# Altium PCB Hammerhead PCB R1.0.PcbDoc (part 1 of 2)
Units mil, origin at the board's own origin, x right, y up, seen from the top; angles counter-clockwise.
Board outline 4625 x 2150 mil, 4 copper layers (Top Layer, Ground Plane, Power Plane, Bottom Layer); 195 components, 202 nets, 791 pads, 418 vias.
Unrouted connection lines stored in the file: 1.
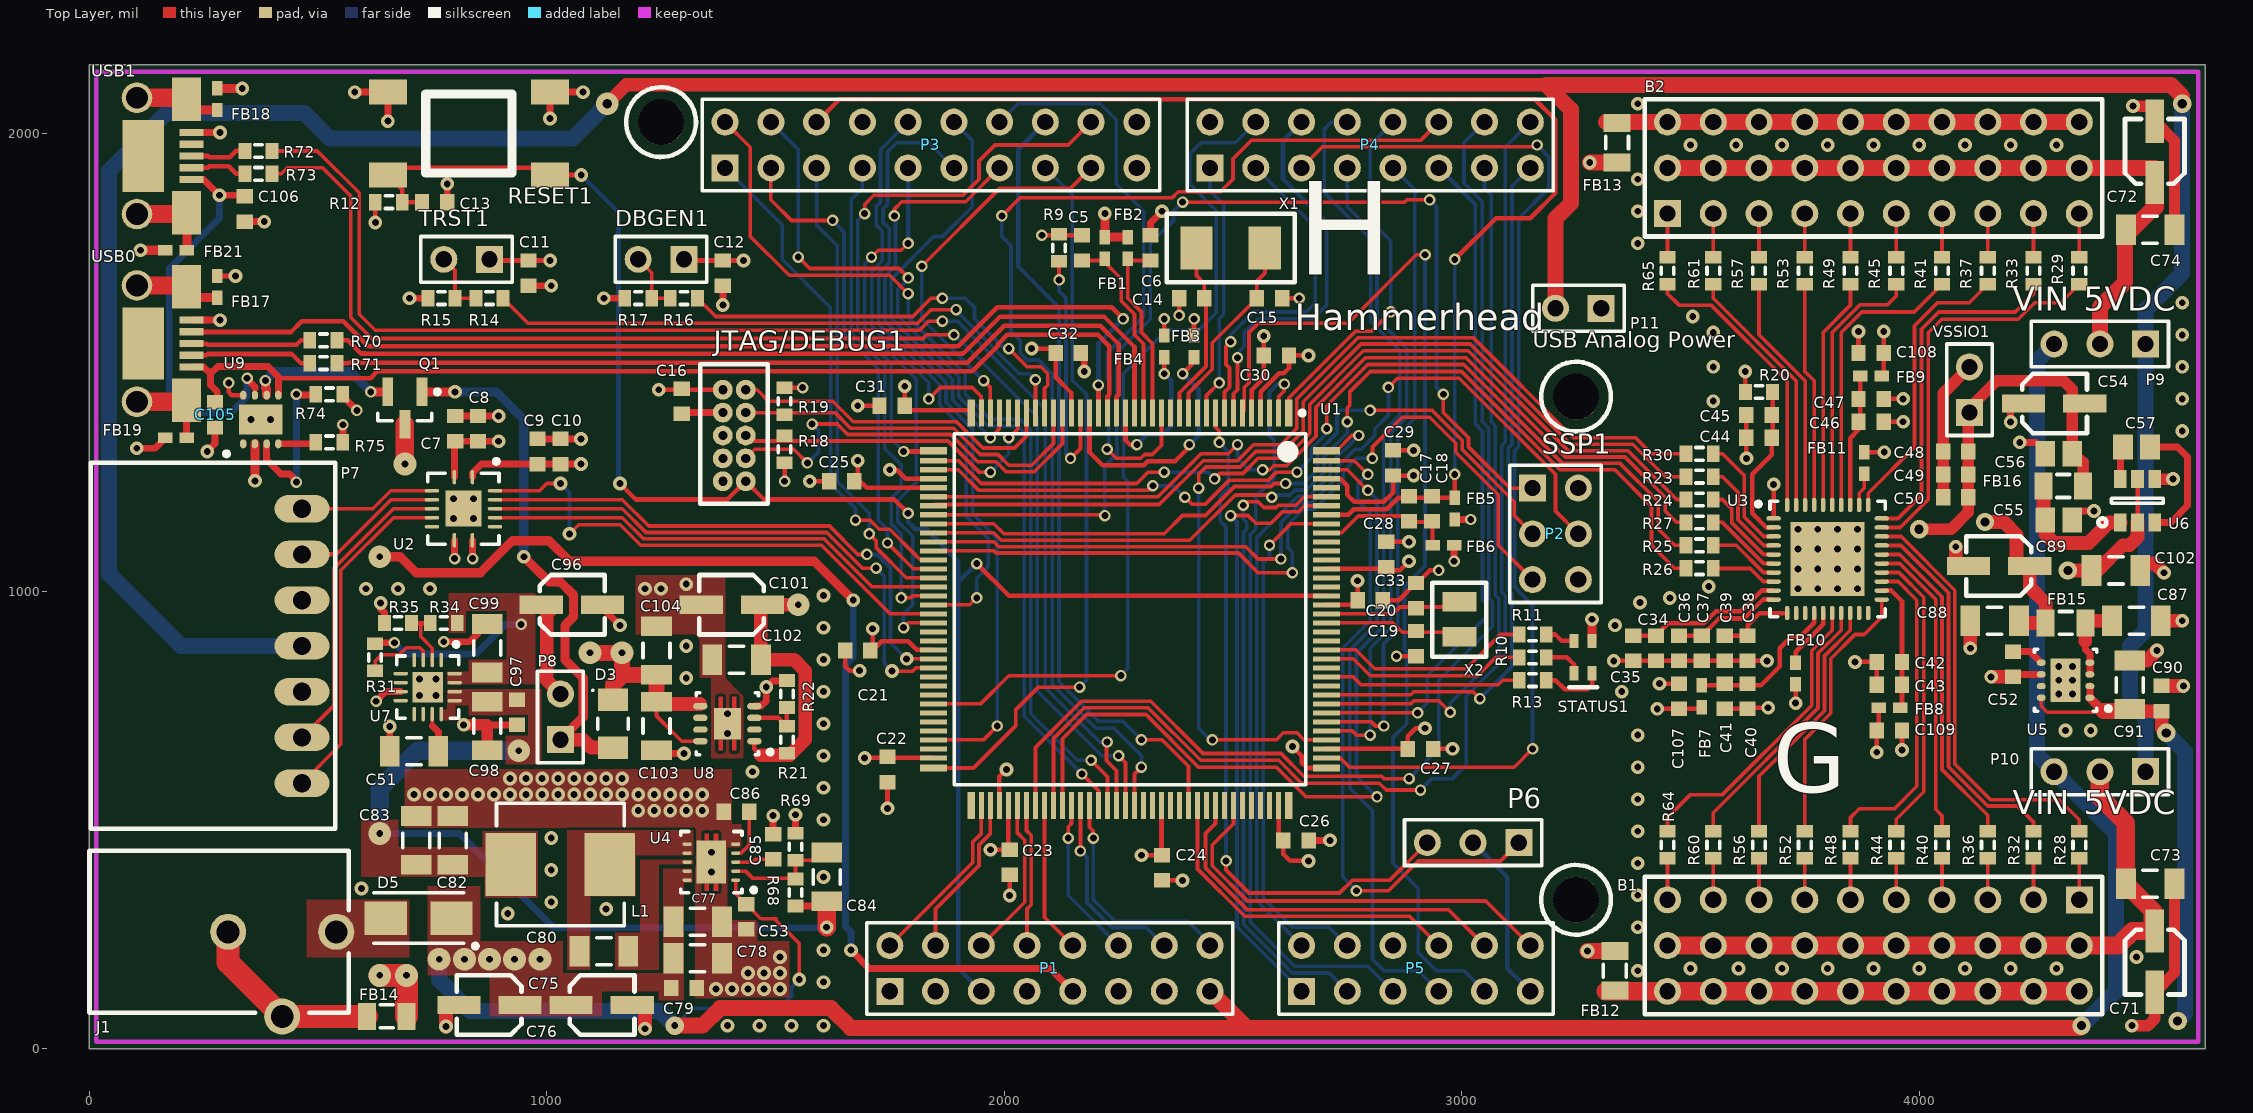
[diagram p0: Top Layer view]
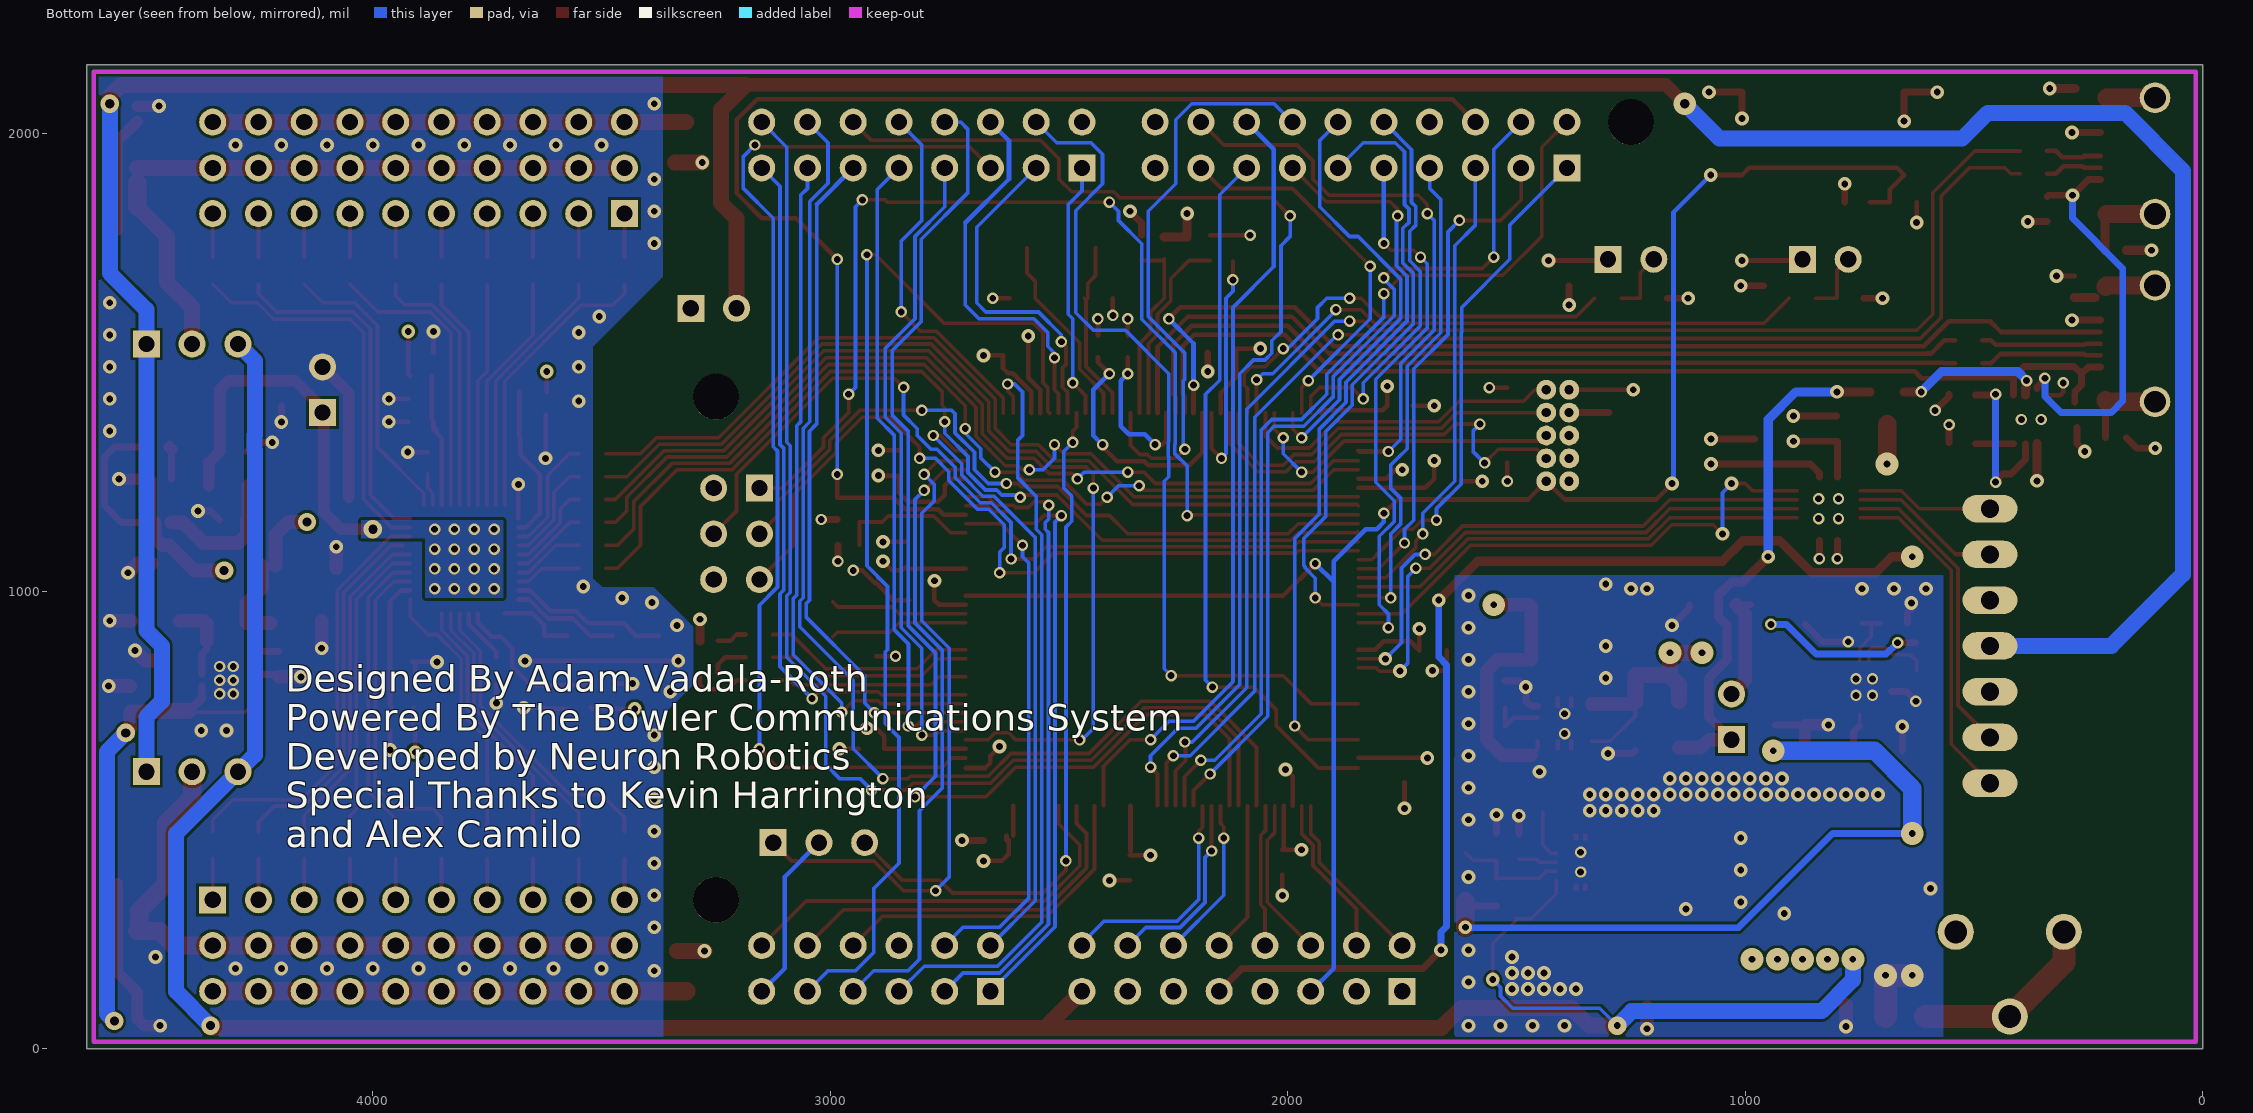
[diagram p1: Bottom Layer view, seen from below]
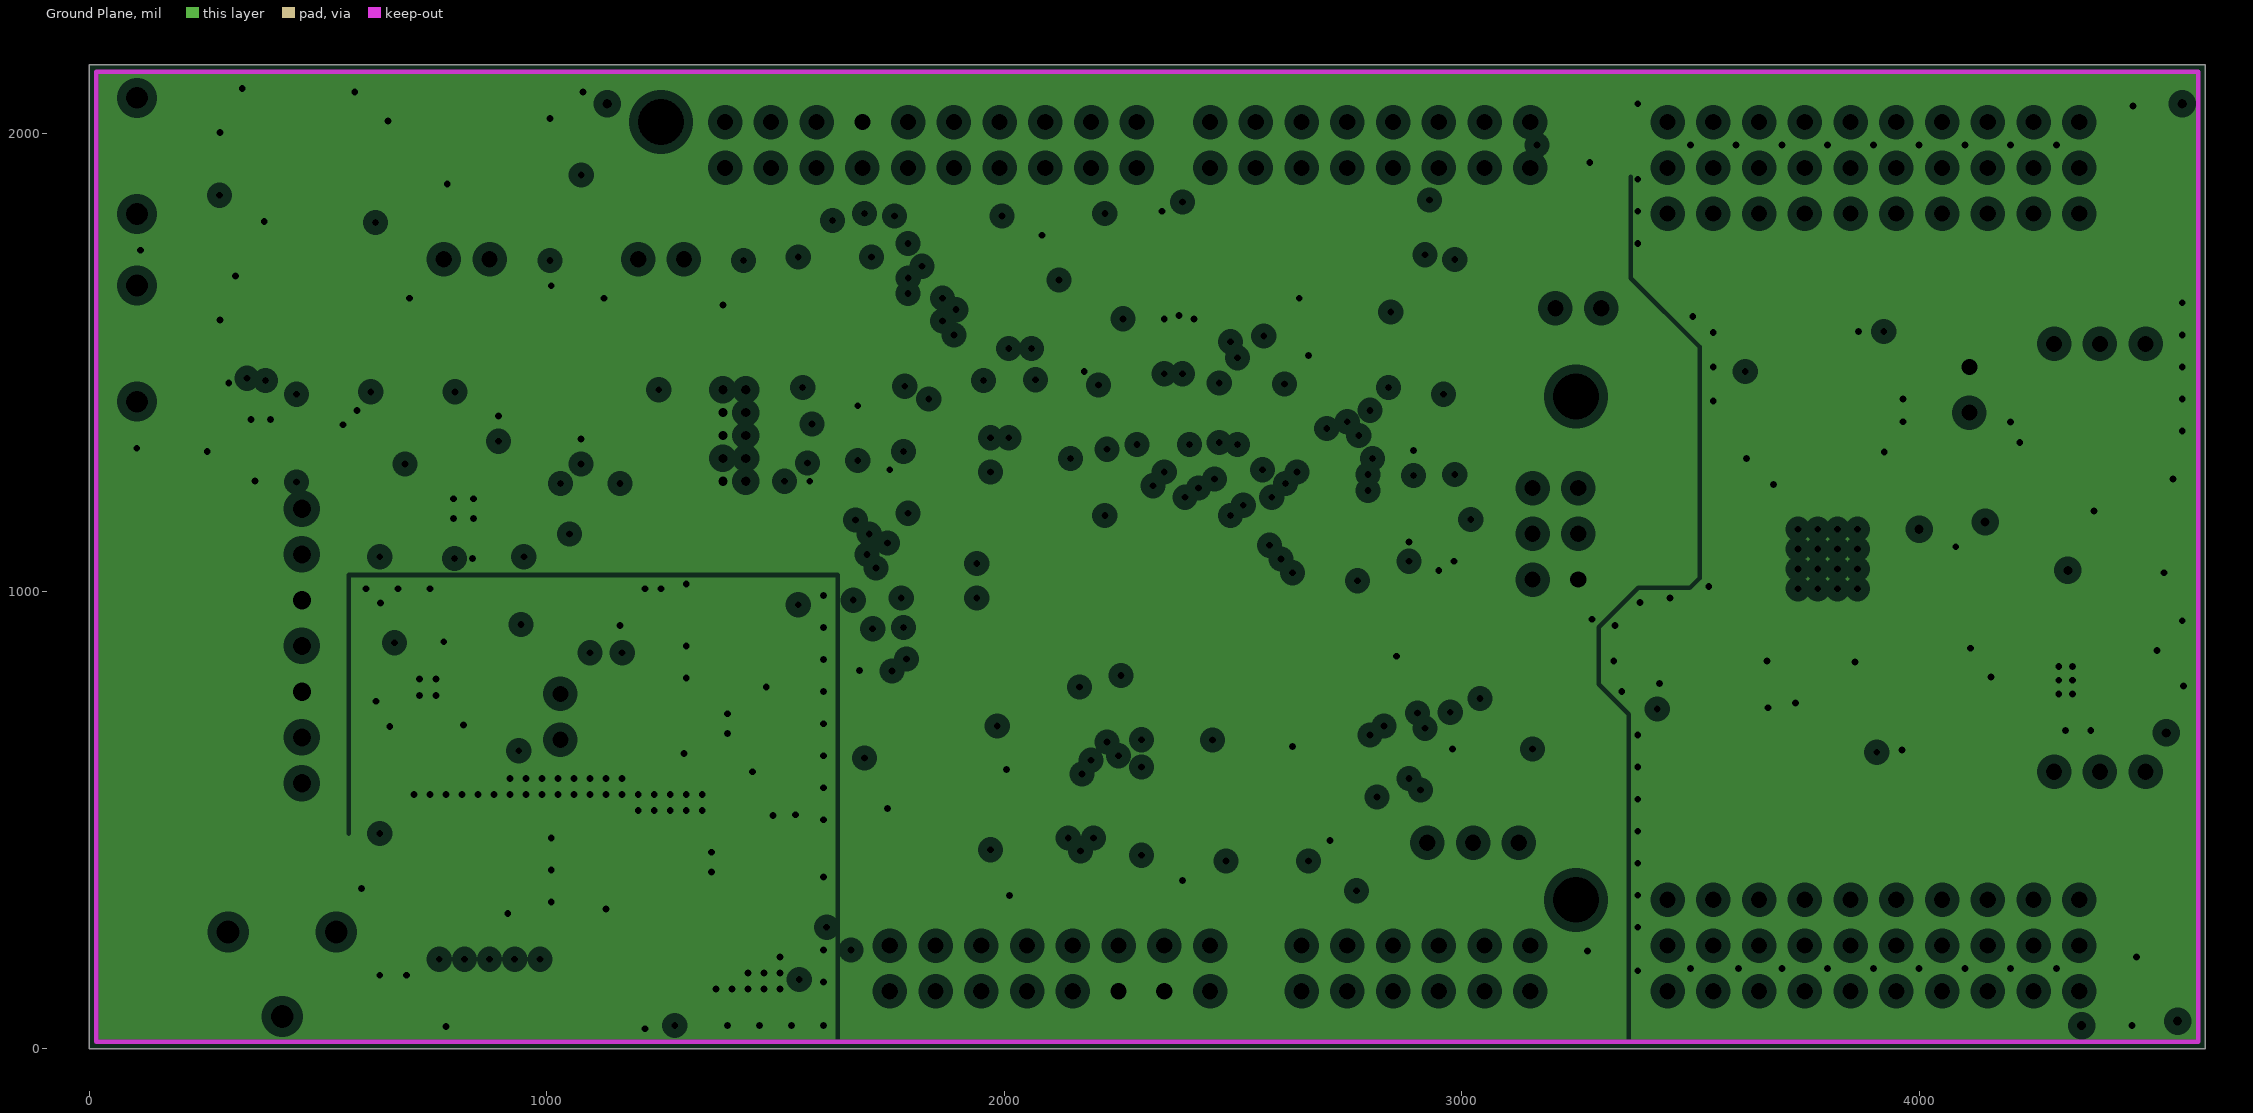
[diagram p2: Ground Plane, clearances drawn from the general rule]
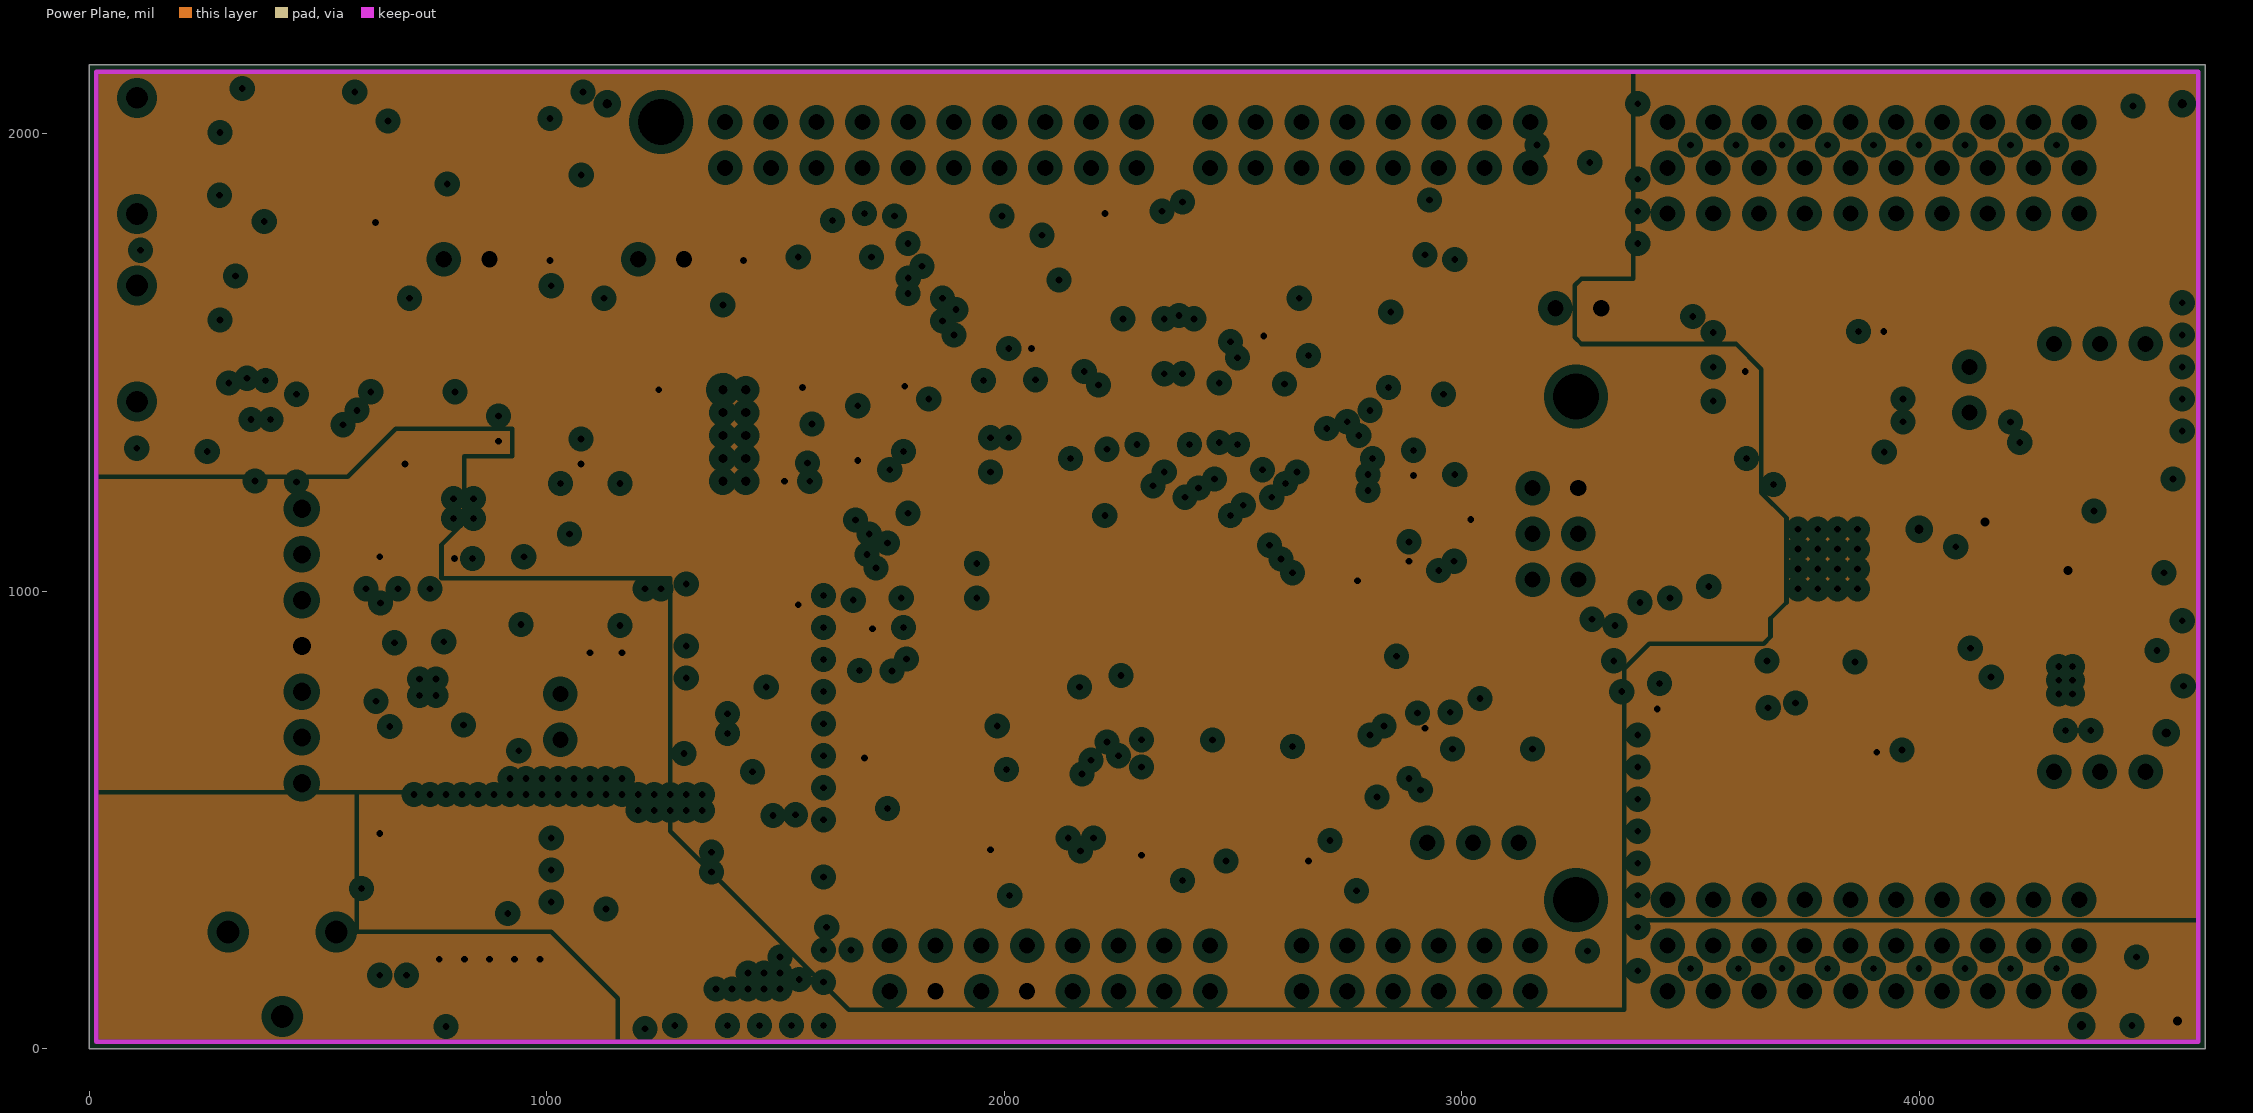
[diagram p3: Power Plane, clearances drawn from the general rule]

## Layer stack, top to bottom
Top Layer: signal copper 1.4
Dielectric: core 12.6, FR-4, Dk 4.8
Ground Plane: plane copper 1.4, net GND
Dielectric: prepreg 12.6, FR-4, Dk 4.8
Power Plane: plane copper 1.4, net (Multiple Nets)
Dielectric: core 12.6, FR-4, Dk 4.8
Bottom Layer: signal copper 1.4

## Board outline
0,0 4625,0 4625,2150 0,2150

## Design rules (kind name [scope] priority, off if disabled: settings)
Clearance [All] p1: gap=6
ComponentClearance [All] p1: gap=0 collisioncheckmode=3 verticalgap=10 showdistances=FALSE
DiffPairsRouting [All] p1: maxlimit=10 minlimit=10 mostfreqgap=10 maxuncoupledlength=500
FanoutControl Fanout_SOIC [(InComponent('U8') AND InComponent('U7'))] p3: bgadir=Out bgaviamode=Centered fanoutstyle=Staggered fanoutdirection=Alternating viagrid=1 // Fanout_SOIC (Default Rule)
FanoutControl Fanout_Small [All] p4: bgadir=Out bgaviamode=Centered fanoutstyle=Auto fanoutdirection=Alternating viagrid=1 // Fanout_Small (Default Rule)
HoleSize [All] p1: absolutevalues=TRUE maxlimit=120 minlimit=1 maxpercent=80.000 minpercent=20.000
MinimumSolderMaskSliver [All] p1 off: minsoldermaskwidth=10
PlaneClearance [All] p1: clearance=20
PlaneConnect 5VDC [InNet('5VDC')] p1: planeconnectstyle=Direct reliefexpansion=20 reliefentries=4 reliefconductorwidth=10 reliefairgap=10
PlaneConnect DVDD [InNet('DVDD')] p2: planeconnectstyle=Direct reliefexpansion=20 reliefentries=4 reliefconductorwidth=10 reliefairgap=10
PlaneConnect "GND Plane" [InNet('GND')] p3: planeconnectstyle=Direct reliefexpansion=20 reliefentries=4 reliefconductorwidth=10 reliefairgap=10
PlaneConnect "VIN Plane" [InNet('VIN')] p4: planeconnectstyle=Direct reliefexpansion=20 reliefentries=4 reliefconductorwidth=10 reliefairgap=10
PlaneConnect [All] p5: planeconnectstyle=Relief reliefexpansion=20 reliefentries=4 reliefconductorwidth=10 reliefairgap=10
PolygonConnect GND [All] p1: connectstyle=Direct reliefconductorwidth=10 reliefentries=4 polygonreliefangle="90 Angle" airgapwidth=10
PolygonConnect VIN [InNet('VIN')] p2: connectstyle=Direct reliefconductorwidth=10 reliefentries=4 polygonreliefangle="90 Angle" airgapwidth=10
PolygonConnect VBST [InNet('VBST')] p3: connectstyle=Direct reliefconductorwidth=10 reliefentries=4 polygonreliefangle="90 Angle" airgapwidth=10
PolygonConnect 6+ [InNet('+6VCC')] p4: connectstyle=Direct reliefconductorwidth=10 reliefentries=4 polygonreliefangle="90 Angle" airgapwidth=10
PolygonConnect SW [InNet('SW')] p5: connectstyle=Direct reliefconductorwidth=10 reliefentries=4 polygonreliefangle="90 Angle" airgapwidth=10
PolygonConnect [All] p6: connectstyle=Relief reliefconductorwidth=10 reliefentries=4 polygonreliefangle="90 Angle" airgapwidth=10
RoutingVias [All] p1: holewidth=15 width=25 viastyle="Through Hole" minholewidth=15 minwidth=25 maxholewidth=28 maxwidth=50
SilkToSilkClearance [All] p1 off: silktosilkclearance=10
SilkToSolderMaskClearance SilkscreenOverComponentPads [IsPad] p1 off: minsilkscreentomaskgap=10 clearancetoexposedcopper=TRUE
SolderMaskExpansion [All] p1: expansion=4
Width [All] p1: maxlimit=50 minlimit=6 preferedwidth=8 minimp=50.000000 maximp=50.000000 favimp=50.000000
18 further rules are at their usual default settings.

## Classes and differential pairs
component class "U_Hammerhead - Arduino Leonardo Shield Headers R1": P1 P2 P3 P4 P5
component class "U_Hammerhead - LPC4337 MCU R1": 60 C5 C6 C7 C8 C9 C10 C11 C12 C13 C14 C15 C16 C17 C18 C19 C20 C21 C22 C23 C24 C25 C26 C27 C28 C29 C30 C31 C32 C33 DBGEN1 FB1 FB2 FB3 FB4 FB5 FB6 JTAG/DEBUG1 P6 P7 R9 R10 R11 R12 R13 R14 R15 R16 R17 R18 R19 RESET1 STATUS1 U1 U2 X1 X2
component class "U_Hammerhead - MAX11300 Analog Hub R1": C34 C35 C36 C37 C38 C39 C40 C41 C42 C43 C44 C45 C46 C47 C48 C49 C50 C107 C108 C109 FB7 FB8 FB9 FB10 FB11 R20 R23 R24 R25 R26 R27 R30 U3 VSSIO1
component class "U_Hammerhead - MAX11300 Breakout Connectors R1": B1 B2 C71 C72 C73 C74 FB12 FB13 P9 P10 R28 R29 R32 R33 R36 R37 R40 R41 R44 R45 R48 R49 R52 R53 R56 R57 R60 R61 R64 R65
component class "U_Hammerhead - Power R1": C51 C52 C53 C54 C55 C56 C57 C75 C76 C77 C78 C79 C80 C82 C83 C84 C85 C86 C87 C88 C89 C90 C91 C96 C97 C98 C99 C101 C102 C103 C104 D3 D5 FB14 FB15 FB16 J1 L1 P8 P11 R21 R22 R31 R34 R35 R68 R69 U4 U5 U6 U7 U8
component class "U_Hammerhead USB R1": C105 C106 FB17 FB18 FB19 FB21 Q1 R70 R71 R72 R73 R74 R75 U9 USB0 USB1
differential pair USB0P: +USB0P_P -USB0P_N
differential pair USB0: +USB0_P -USB0_N
differential pair USB1P: +USB1P_P -USB1P_N
differential pair USB1: +USB1_P -USB1_N

## Components (designator, comment, footprint, x,y, rotation, side; value= is the part's Value field where it differs from the comment)
B1 "IO Bank L" "2.54mm 10X3 Header" 4350,325 r270 top
B2 "IO Bank R" "2.54mm 10X3 Header" 3450,1825 r90 top locked
C5 "Cap Semi" 1608[0603] 2170,1750 r270 top
C6 "Cap Semi" 1608[0603] 2320,1750 r270 top
C7 "0603" 1608[0603] 800,1355 r270 top
C8 "0603" 1608[0603] 850,1355 r270 top
C9 "0603" 1608[0603] 980,1305 r270 top
C10 "0603" 1608[0603] 1030,1305 r270 top
C11 "Cap Semi" 1608[0603] 960,1695 r90 top
C12 "Cap Semi" 1608[0603] 1385,1695 r90 top
C13 "Cap Semi" 1608[0603] 755,1850 r180 top
C14 "Cap Semi" 1608[0603] 2410,1640 r0 top
C15 "Cap Semi" 1608[0603] 2580,1640 r180 top
C16 "Cap Semi" 1608[0603] 1295,1415 r270 top
C17 "Cap Semi" 1608[0603] 2885,1180 r90 top
C18 "Cap Semi" 1608[0603] 2935,1180 r90 top
C19 "Cap Semi" 1608[0603] 2900,885 r90 top
C20 "Cap Semi" 1608[0603] 2900,990 r270 top
C21 "Cap Semi" 1608[0603] 1680,870 r0 top
C22 "Cap Semi" 1608[0603] 1745,610 r90 top
C23 "Cap Semi" 1608[0603] 2012,407 r90 top
C24 "Cap Semi" 1608[0603] 2345,395 r90 top
C25 "Cap Semi" 1608[0603] 1645,1240 r0 top
C26 "Cap Semi" 1608[0603] 2638,455 r180 top
C27 "Cap Semi" 1608[0603] 2910,655 r180 top
C28 "Cap Semi" 1608[0603] 2835,1080 r270 top
C29 "Cap Semi" 1608[0603] 2850,1280 r270 top
C30 "Cap Semi" 1608[0603] 2595,1515 r180 top
C31 "Cap Semi" 1608[0603] 1755,1405 r0 top
C32 "Cap Semi" 1608[0603] 2140,1520 r180 top
C33 "Cap Semi" 1608[0603] 2800,980 r180 top
C34 "0603" 1608[0603] 3425,875 r90 top
C35 "0603" 1608[0603] 3375,875 r90 top
C36 "0603" 1608[0603] 3475,875 r90 top
C37 "0603" 1608[0603] 3525,875 r90 top
C38 "0603" 1608[0603] 3625,875 r90 top
C39 "0603" 1608[0603] 3575,875 r90 top
C40 "0603" 1608[0603] 3625,770 r90 top
C41 "0603" 1608[0603] 3575,770 r90 top
C42 "0603" 1608[0603] 3935,845 r0 top
C43 "0603" 1608[0603] 3935,795 r0 top
C44 "0603" 1608[0603] 3650,1335 r0 top
C45 "0603" 1608[0603] 3650,1385 r0 top
C46 "0603" 1608[0603] 3895,1370 r180 top
C47 "0603" 1608[0603] 3895,1420 r180 top
C48 "0603" 1608[0603] 4080,1305 r0 top
C49 "0603" 1608[0603] 4080,1255 r0 top
C50 "0603" 1608[0603] 4080,1205 r0 top
C51 "1206" C1206 710,650 r0 top
C52 "0603" 1608[0603] 4205,840 r90 top
C53 "0603" 1608[0603] 1436,288 r90 top
C54 "VS B" "Panasonic VS B" 4365,1475 r180 top
C55 "0805" C0805 4305,1155 r180 top
C56 "0805" C0805 4305,1300 r0 top
C57 "0805" C0805 4475,1315 r0 top
C71 "VS B" "Panasonic VS B" 4580,120 r90 top
C72 "VS B" "Panasonic VS B" 4450,2030 r270 top
C73 "1206 Tantalum" C1206 4505,360 r180 top
C74 "1206 Tantalum" C1206 4505,1790 r180 top
C75 "VS B" "Panasonic VS B" 1190,160 r180 top
C76 "VS B" "Panasonic VS B" 805,30 r0 top
C77 "1206" C1206 1330,277.5 r180 top
C78 "1206" C1206 1330,197.5 r180 top
C79 "0603" 1608[0603] 1300,132.5 r180 top
C80 "1206" C1206 1125,212.5 r180 top
C82 "1206" C1206 795,455 r270 top
C83 "1206" C1206 715,455 r270 top
C84 "1206" C1206 1612,375 r90 top
C85 "0603" 1608[0603] 1495,441 r270 top
C86 "0603" 1608[0603] 1415,517.5 r0 top
C87 "1206" C1206 4475,935 r180 top
C88 "1206" C1206 4165,935 r0 top
C89 "VS B" "Panasonic VS B" 4105,990 r0 top
C90 "0603" 1608[0603] 4530,765 r270 top
C91 "1206" C1206 4460,795 r270 top
C96 "VS B" "Panasonic VS B" 1125,1035 r180 top
C97 "0603" 1608[0603] 935,735 r90 top
C98 "1206" C1206 870,705 r90 top
C99 "1206" C1206 870,875 r270 top
C101 "VS B" "Panasonic VS B" 1335,905 r0 top
C102 "1206" C1206 1415,850 r0 top
C102 "1206" C1206 4430,1045 r180 top
C103 "1206" C1206 1240,705 r90 top
C104 "1206" C1206 1240,870 r270 top
C105 "0603" 1608[0603] 275,1385 r90 top
C106 "0603" 1608[0603] 340,1835 r90 top
C107 "0603" 1608[0603] 3475,770 r270 top
C108 "0603" 1608[0603] 3895,1520 r0 top
C109 "0603" 1608[0603] 3935,695 r180 top
D3 "1N5819HW-7-F" DIOM2715X14N 1145,710 r90 top
D5 "PMEG4050EP" PMEG4050EP 720,285 r180 top
DBGEN1 "Header 2" HDR1X2 1300,1725 r180 top
FB1 "BLM15HG601SN1D" BLM18PG121SN1D 2220,1750 r270 top
FB2 "BLM15HG601SN1D" BLM18PG121SN1D 2270,1750 r270 top
FB3 "BLM15HG601SN1D" BLM18PG121SN1D 2415,1535 r90 top
FB4 "BLM15HG601SN1D" BLM18PG121SN1D 2350,1535 r90 top
FB5 "BLM15HG601SN1D" BLM18PG121SN1D 2985,1180 r90 top
FB6 "BLM15HG601SN1D" BLM18PG121SN1D 2960,1100 r180 top
FB7 "BLM15HG601SN1D" BLM18PG121SN1D 3525,770 r270 top
FB8 "BLM15HG601SN1D" BLM18PG121SN1D 3935,745 r180 top
FB9 "BLM15HG601SN1D" BLM18PG121SN1D 3895,1470 r0 top
FB10 "BLM15HG601SN1D" BLM18PG121SN1D 3730,820 r90 top
FB11 "BLM15HG601SN1D" BLM18PG121SN1D 3880,1280 r270 top
FB12 "MI0805L301R-10" "SM 0805 - gap trimmed" 3335,170 r270 top
FB13 "MI0805L301R-10" "SM 0805 - gap trimmed" 3340,1980 r270 top
FB14 "MI0805L301R-10" "SM 0805 - gap trimmed" 650,70 r180 top
FB15 "MI0805L301R-10" "SM 0805 - gap trimmed" 4320,930 r180 top
FB16 "MI0805L301R-10" "SM 0805 - gap trimmed" 4315,1230 r0 top
FB17 "BLM15HG601SN1D" BLM18PG121SN1D 280,1665 r270 top
FB18 "BLM15HG601SN1D" BLM18PG121SN1D 280,2075 r270 top
FB19 "BLM15HG601SN1D" BLM18PG121SN1D 190,1335 r0 top
FB21 "BLM15HG601SN1D" BLM18PG121SN1D 190,1745 r0 top
J1 "Center-positive 2.1 mm power jack" PJ-102AH 540,255 r90 top
JTAG/DEBUG1 "S9015E-05-ND" S9015E-05-ND 1385,1240 r90 top
L1 "SPM6530T-1R5M100" SPM6530T 1030,402.5 r180 top
P1 "Header 8X2" HDR2X8 1750,125 r0 top locked
P2 "Header 3X2" HDR2X3 3155,1225 r270 top locked
P3 "Header 10X2" HDR2X10 1390,1925 r0 top locked
P4 "Header 8X2" HDR2X8 2450,1925 r0 top locked
P5 "Header 6X2" HDR2X6 2650,125 r0 top locked
P6 "Header 3" HDR1X3 3125,450 r180 top
P7 "BCS UART Molex - 0705430006" "BCS Serial Port - Molex" 538,1280 r270 top
P8 "Header 2" HDR1X2 1030,675 r90 top
P9 "Header 3" HDR1X3 4495,1540 r180 top
P10 "Header 3" HDR1X3 4495,605 r180 top
P11 "Header 2" HDR1X2 3305,1618 r180 top
Q1 "IRLML6402" SOT95P237X112-3N 690,1400 r270 top
R9 "Res3" J1-0603 2120,1750 r270 top
R10 "Res3" J1-0603 3155,855 r0 top
R11 "Res3" J1-0603 3155,905 r180 top
R12 "Res3" J1-0603 655,1850 r180 top
R13 "Res3" J1-0603 3155,805 r0 top
R14 "Res3" J1-0603 875,1640 r180 top
R15 "Res3" J1-0603 770,1640 r0 top
R16 "Res3" J1-0603 1300,1640 r180 top
R17 "Res3" J1-0603 1200,1640 r0 top
R18 "Res3" J1-0603 1520,1310 r270 top
R19 "Res3" J1-0603 1520,1415 r90 top
R20 "0603" J1-0603 3650,1435 r0 top
R21 "0603" J1-0603 1525,675 r270 top
R22 "0603" J1-0603 1525,775 r270 top
R23 "0603" J1-0603 3520,1250 r0 top
R24 "0603" J1-0603 3520,1200 r0 top
R25 "0603" J1-0603 3520,1100 r0 top
R26 "0603" J1-0603 3520,1050 r0 top
R27 "0603" J1-0603 3520,1150 r0 top
R28 "0603" J1-0603 4350,445 r270 top
R29 "0603" J1-0603 4350,1700 r270 top
R30 "0603" J1-0603 3520,1300 r0 top
R31 "Res3" J1-0603 625,855 r270 top
R32 "0603" J1-0603 4250,445 r270 top
R33 "0603" J1-0603 4250,1700 r270 top
R34 "Res3" J1-0603 775,930 r0 top
R35 "Res3" J1-0603 675,930 r0 top
R36 "0603" J1-0603 4150,445 r270 top
R37 "0603" J1-0603 4150,1700 r270 top
R40 "0603" J1-0603 4050,445 r270 top
R41 "0603" J1-0603 4050,1700 r270 top
R44 "0603" J1-0603 3950,445 r270 top
R45 "0603" J1-0603 3950,1700 r270 top
R48 "0603" J1-0603 3850,445 r270 top
R49 "0603" J1-0603 3850,1700 r270 top
R52 "0603" J1-0603 3750,445 r270 top
R53 "0603" J1-0603 3750,1700 r270 top
R56 "0603" J1-0603 3650,445 r270 top
R57 "0603" J1-0603 3650,1700 r270 top
R60 "0603" J1-0603 3550,445 r270 top
R61 "0603" J1-0603 3550,1700 r270 top
R64 "0603" J1-0603 3450,445 r270 top
R65 "0603" J1-0603 3450,1700 r270 top
R68 "0603" J1-0603 1544,340.97 r90 top
R69 "0603" J1-0603 1544,440.97 r270 top
R70 "0603" J1-0603 512,1548 r0 top
R71 "0603" J1-0603 512,1498 r0 top
R72 "0603" J1-0603 370,1962 r0 top
R73 "0603" J1-0603 370,1912 r0 top
R74 "0603" J1-0603 525,1430 r180 top
R75 "0603" J1-0603 525,1325 r180 top
RESET1 "Tactile Switch" TL3301 830,2000 r90 top
STATUS1 "APTF1616SEEZGQBDC" "RGB LED APTF1616SEEZGQBDC" 3285,820 r90 top
TRST1 "Header 2" HDR1X2 875,1725 r180 top
U1 "LPC4330FBD144" SOT486-1_V 2275,960 r270 top locked
U2 "TXS0104E Level Shifter" "RGY  (S-PVQFN-N14)" 818,1180 r270 top
U3 "MAX11300 - 40 Pin TQFN" "Maxim T4066+3 40 pin TQFN" 3800,1070 r0 top
U4 "TPS54327 - DCDC Regulator" TPS54327 1360,407.5 r180 top
U5 "TPS79650DRBT" QFN65P300X300X100_HS-17N 4320,805 r180 top
U6 "NCP1729" SOT6 4440,1150 r90 top
U7 "TPS7A7200RGTT" QFN50P300X300X100_HS-17N 740,790 r270 top
U8 "TPS73733QDRBRQ1" "QFN65P300X300X100_HS-17N - smaller pad" 1395,710 r180 top
U9 "TPS2115A" "DRB S-PVSON-N8" 375,1375 r90 top
USB0 "DX4R005J91R5100" "Micro USB Circular Holes Only" 65,1540 r270 top (schematic designator J2)
USB1 "DX4R005J91R5100" "Micro USB Circular Holes Only" 65,1950 r270 top (schematic designator J3)
VSSIO1 "Header 2" HDR1X2 4110,1390 r90 top
X1 "445C35A12M00000" 445C35A12M00000 2570,1750 r180 top
X2 "ABS07-32.768KHZ-T" ABS07-32.768KHZ-T 2995,900 r90 top

## Footprints (in the part's own frame and the unit in brackets; to place one, negate y for a bottom-side part, rotate by r counter-clockwise, add the part's x,y. Pads: shape width x height; smd on the part's side, far side on the other; paste and mask are expansions set on the pad)
"2.54mm 10X3 Header" [mm]
  rect 1.5x1.5 hole 0.9: 1(0,0)
  round 1.5 hole 0.9: 2(0,-2.54) 3(0,-5.08) 4(0,-7.62) 5(0,-10.16) 6(0,-12.7) 7(0,-15.24) 8(0,-17.78) 9(0,-20.32) 10(0,-22.86) 11(2.54,0) 12(2.54,-2.54) 13(2.54,-5.08) 14(2.54,-7.62) 15(2.54,-10.16) 16(2.54,-12.7) 17(2.54,-15.24) 18(2.54,-17.78) 19(2.54,-20.32) 20(2.54,-22.86) 21(5.08,0) 22(5.08,-2.54) 23(5.08,-5.08) 24(5.08,-7.62) 25(5.08,-10.16) 26(5.08,-12.7) 27(5.08,-15.24) 28(5.08,-17.78) 29(5.08,-20.32) 30(5.08,-22.86)
  silkscreen extent -1.27,-24.13 6.35,1.27
445C35A12M00000 [mm] "Crystal Oscillator"
  rect 1.8x2.4 smd: 1(0,0) 2(3.8,0)
  silkscreen extent -1.65,-1.91 5.46,1.91, body extent -1.27,-1.52 5.08,1.52, height 1
1608[0603] [mm] "Chip Capacitor, Body 1.6x0.8mm, IPC High Density"
  rect 0.8x0.9 smd: 1(-0.7,0) 2(0.7,0)
  body extent -0.87,-0.48 0.87,0.48, height 1.3
ABS07-32.768KHZ-T [mm] "ABS07-32.768KHZ-T Crystal Oscillator"
  rect 1.1x1.9 smd: 1(0,0) 2(1.95,0)
  silkscreen extent -1.1,-1.5 3,1.5
"BCS Serial Port - Molex" [mil] "Molex - 0705530041"
  oval 60x120 hole 40: 1(100,-73) 2(200,-73) 3(300,-73) 4(400,-73) 5(500,-73) 6(600,-73) 7(700,-73)
  silkscreen extent 0,-535 800,0, body extent 0,-535 800,3, height 177
BLM18PG121SN1D [mm] "Chip Inductor, 2-Leads, Body 1.0x0.5mm, IPC Medium Density"
  rect 0.8x0.6 smd: 1(-0.6,0) 2(0.6,0)
  body extent -0.52,-0.28 0.53,0.27, height 0.6
C0805 [mm] "Chip Capacitor, Body 2.0x1.3mm, IPC High Density"
  rect 1.1x1.4 smd: 1(-0.75,0) 2(0.75,0)
  body extent -1.1,-0.72 1.1,0.72, height 1.4
C1206 [mm] "Chip Capacitor, Body 3.2x1.6mm, IPC High Density"
  rect 1.1x1.7 smd: 1(-1.35,0) 2(1.35,0)
  silkscreen extent -0.4,-0.75 0.4,0.75, body extent -1.7,-0.9 1.7,0.9, height 1.3
DIOM2715X14N [mm] "Molded Diode, 2-Leads, Body 2.70x1.55mm, IPC Medium Density"
  rect 1.25x1.65 smd: 1(-1.325,0) 2(1.325,0)
  silkscreen extent -0.3,-0.85 1.9,1.17, body extent -1.43,-0.85 1.42,0.85, height 1.35
"DRB S-PVSON-N8" [mm] "QFN, 16-Leads, Body 3.00x3.00mm, Pitch 0.65mm, Thermal Pad 2.40x1.65mm, IPC Medium Density"
  oval 0.5x0.35 smd: 1(-1.35,0.975) 2(-1.35,0.325) 3(-1.35,-0.325) 4(-1.35,-0.975) 5(1.35,-0.975) 6(1.35,-0.325) 7(1.35,0.325) 8(1.35,0.975)
  rect 1.65x2.4 smd: 9(0,0)
  silkscreen extent -2.03,1.78 -1.78,2.03, body extent -1.58,-1.58 1.58,1.57, height 1
HDR1X2 [mm] "Connector; Header; 2 Position"
  rect 1.5x1.5 hole 0.9: 1(0,0)
  round 1.5 hole 0.9: 2(2.54,0)
  silkscreen extent -1.27,-1.27 3.81,1.27
HDR1X3 [mm] "Connector; Header; 3 Position"
  rect 1.5x1.5 hole 0.9: 1(0,0)
  round 1.5 hole 0.9: 2(2.54,0) 3(5.08,0)
  silkscreen extent -1.27,-1.27 6.35,1.27
HDR2X3 [mm] "Connector; Header; 3x2 Position"
  rect 1.5x1.5 hole 0.9: 1(0,0)
  round 1.5 hole 0.9: 2(0,2.54) 3(2.54,0) 4(2.54,2.54) 5(5.08,0) 6(5.08,2.54)
  silkscreen extent -1.27,-1.27 6.35,3.81
HDR2X6 [mm] "Connector; Header; 6x2 Position"
  rect 1.5x1.5 hole 0.9: 1(0,0)
  round 1.5 hole 0.9: 2(0,2.54) 3(2.54,0) 4(2.54,2.54) 5(5.08,0) 6(5.08,2.54) 7(7.62,0) 8(7.62,2.54) 9(10.16,0) 10(10.16,2.54) 11(12.7,0) 12(12.7,2.54)
  silkscreen extent -1.27,-1.27 13.97,3.81
HDR2X8 [mm] "Connector; Header; 8x2 Position"
  rect 1.5x1.5 hole 0.9: 1(0,0)
  round 1.5 hole 0.9: 2(0,2.54) 3(2.54,0) 4(2.54,2.54) 5(5.08,0) 6(5.08,2.54) 7(7.62,0) 8(7.62,2.54) 9(10.16,0) 10(10.16,2.54) 11(12.7,0) 12(12.7,2.54) 13(15.24,0) 14(15.24,2.54) 15(17.78,0) 16(17.78,2.54)
  silkscreen extent -1.27,-1.27 19.05,3.81
HDR2X10 [mm] "Connector; Header; 10x2 Position"
  rect 1.5x1.5 hole 0.9: 1(0,0)
  round 1.5 hole 0.9: 2(0,2.54) 3(2.54,0) 4(2.54,2.54) 5(5.08,0) 6(5.08,2.54) 7(7.62,0) 8(7.62,2.54) 9(10.16,0) 10(10.16,2.54) 11(12.7,0) 12(12.7,2.54) 13(15.24,0) 14(15.24,2.54) 15(17.78,0) 16(17.78,2.54) 17(20.32,0) 18(20.32,2.54) 19(22.86,0) 20(22.86,2.54)
  silkscreen extent -1.27,-1.27 24.13,3.81
J1-0603 [mm] "Chip Resistor, Body 1.6x0.8mm, IPC High Density"
  rect 0.7x0.9 smd: 1(-0.75,0) 2(0.75,0)
  silkscreen extent -0.2,-0.35 0.2,0.35, body extent -0.85,-0.48 0.85,0.48, height 0.9
"Maxim T4066+3 40 pin TQFN" [mm] "QFN, 40-Leads, Body 6.00x6.00mm, Pitch 0.50mm, Thermal Pad 4.10x4.10mm, IPC Medium Density"
  oval 0.8x0.25 smd: 1(-3,2.25) 2(-3,1.75) 3(-3,1.25) 4(-3,0.75) 5(-3,0.25) 6(-3,-0.25) 7(-3,-0.75) 8(-3,-1.25) 9(-3,-1.75) 10(-3,-2.25) 21(3,-2.25) 22(3,-1.75) 23(3,-1.25) 24(3,-0.75) 25(3,-0.25) 26(3,0.25) 27(3,0.75) 28(3,1.25) 29(3,1.75) 30(3,2.25)
  oval 0.25x0.8 smd: 11(-2.25,-3) 12(-1.75,-3) 13(-1.25,-3) 14(-0.75,-3) 15(-0.25,-3) 16(0.25,-3) 17(0.75,-3) 18(1.25,-3) 19(1.75,-3) 20(2.25,-3) 31(2.25,3) 32(1.75,3) 33(1.25,3) 34(0.75,3) 35(0.25,3) 36(-0.25,3) 37(-0.75,3) 38(-1.25,3) 39(-1.75,3) 40(-2.25,3)
  rect 4.1x4.1 smd: 41(0,0)
  silkscreen extent -3.97,-3.2 3.2,3.2, body extent -3.05,-3.05 3.05,3.05, height 0.8
"Micro USB Circular Holes Only" [mm]
  rect 0.4x1.35 smd: 1(1.275,4.025) 2(0.625,4.025) 3(-0.025,4.025) 4(-0.675,4.025) 5(-1.325,4.025)
  rect 2.4x1.6 smd: 6(3.125,3.75) 9(-3.175,3.75)
  round 1.7 hole 1.2: 7(3.2,1) 8(-3.25,1)
  rect 4x2.3 smd: GND(-0.025,1.35)
  body extent -4.1,-1.64 4.1,3.79, height 2.73
"Panasonic VS B" [mm]
  rect 2.4x1 smd: 1(3.478,1.651) 2(0.078,1.651)
  silkscreen extent -0.05,0 3.55,3.3
PJ-102AH [mm] "Center positive 2.1 mm power jack"
  round 2 hole 1.27: 1(0,0) 2(0,6) 3(-4.7,3)
  silkscreen extent -4.5,-0.7 4.5,13.7, body extent -5.8,-0.7 4.5,13.7, height 11
PMEG4050EP [mm] "PMEG4050EP NXP SMD Schottky Diode"
  rect 2.35x1.85 smd: 1(-1.825,0) 2(1.825,0)
  silkscreen extent -3.28,-1.4 2.5,1.67, body extent -2.5,-1.35 2.5,1.35, height 1.1
QFN50P300X300X100_HS-17N [mm] "QFN, 16-Leads, Body 3.00x3.00mm, Pitch 0.50mm, Thermal Pad 1.70x1.70mm, IPC Medium Density"
  oval 0.8x0.2 smd: 1(-1.5,0.75) 2(-1.5,0.25) 3(-1.5,-0.25) 4(-1.5,-0.75) 9(1.5,-0.75) 10(1.5,-0.25) 11(1.5,0.25) 12(1.5,0.75)
  oval 0.2x0.8 smd: 5(-0.75,-1.5) 6(-0.25,-1.5) 7(0.25,-1.5) 8(0.75,-1.5) 13(0.75,1.5) 14(0.25,1.5) 15(-0.25,1.5) 16(-0.75,1.5)
  rect 1.7x1.7 smd: 17(0,0)
  silkscreen extent -2.5,-1.73 1.73,1.73, body extent -1.58,-1.58 1.58,1.58, height 1
QFN65P300X300X100_HS-17N [mm] "QFN, 16-Leads, Body 3.00x3.00mm, Pitch 0.65mm, Thermal Pad 2.40x1.65mm, IPC Medium Density"
  oval 0.5x0.35 smd: 1(-1.35,0.975) 2(-1.35,0.325) 3(-1.35,-0.325) 4(-1.35,-0.975) 5(1.35,-0.975) 6(1.35,-0.325) 7(1.35,0.325) 8(1.35,0.975)
  rect 1.65x2.4 smd: 9(0,0)
  silkscreen extent -2.5,-1.73 1.73,1.73, body extent -1.58,-1.58 1.58,1.57, height 1
"QFN65P300X300X100_HS-17N - smaller pad" [mm] "QFN, 16-Leads, Body 3.00x3.00mm, Pitch 0.65mm, Thermal Pad 1.75x1.50mm, IPC Medium Density"
  oval 0.8x0.35 smd: 1(-1.5,0.975) 2(-1.5,0.325) 3(-1.5,-0.325) 4(-1.5,-0.975) 5(1.5,-0.975) 6(1.5,-0.325) 7(1.5,0.325) 8(1.5,0.975)
  rect 1.5x1.75 smd: 9(0,0)
  Top Layer region: -0.508,-1.499 -0.254,-1.499 -0.254,-0.864 -0.508,-0.864
  Top Layer region: 0.254,-1.499 0.508,-1.499 0.508,-0.864 0.254,-0.864
  Top Layer region: 0.254,0.864 0.508,0.864 0.508,1.499 0.254,1.499
  Top Layer region: -0.508,0.864 -0.254,0.864 -0.254,1.499 -0.508,1.499
  silkscreen extent -2.5,-1.73 1.73,1.73, body extent -1.58,-1.58 1.58,1.58, height 1
"RGB LED APTF1616SEEZGQBDC" [mm] "RGB LED"
  rect 0.8x0.5 smd: 1(1.8,0) 2(0,0) 3(0,1) 4(1.8,1)
  silkscreen extent -0.77,-0.3 -0.77,1.28
"RGY  (S-PVQFN-N14)" [mm] "QFN, 16-Leads, Body 3.50x3.50mm, Pitch 0.50mm, Thermal Pad 2.00x2.00mm, IPC Medium Density"
  oval 0.8x0.2 smd: 1(-1.75,0.5) 7(1.75,0.5) 8(1.75,-0.5) 14(-1.75,-0.5)
  oval 0.2x0.8 smd: 2(-1,1.75) 3(-0.5,1.75) 4(0,1.75) 5(0.5,1.75) 6(1,1.75) 9(1,-1.75) 10(0.5,-1.75) 11(0,-1.75) 12(-0.5,-1.75) 13(-1,-1.75)
  rect 2x2 smd: 15(0,0)
  silkscreen extent -2.75,-1.97 1.97,1.97, body extent -1.83,-1.83 1.83,1.83, height 1
S9015E-05-ND [mm] "10 Pin Cortex JTAG Debug Header"
  round 1.1 hole 0.508: 1(5.08,0) 2(5.08,-1.27) 3(3.81,0) 4(3.81,-1.27) 5(2.54,0) 6(2.54,-1.27) 7(1.27,0) 8(1.27,-1.27) 9(0,0) 10(0,-1.27)
  round 0.5 on Top Overlay: 1(7,0.8)
  silkscreen extent -1.25,-2.5 6.5,1.25
"SM 0805 - gap trimmed" [mm]
  rect 1x1.5 smd: 1(-1.1,0) 2(1.1,0)
  silkscreen extent -0.36,-0.64 0.35,0.63
SOT6 [mm]
  rect 1x0.7 smd: 1(0,0) 2(0,-0.95) 3(0,-1.9) 4(2.4,-1.9) 5(2.4,-0.95) 6(2.4,0)
  silkscreen extent -0.22,-2.38 1.33,1.22
SOT95P237X112-3N [mm] "SOT23, 3-Leads, Body 2.92x2.37mm, Pitch 0.95mm, IPC Medium Density"
  rect 1.6x0.6 smd: 1(-0.9,0.95) 2(-0.9,-0.95) 3(0.9,0)
  silkscreen extent -1.02,-1.5 0.7,1.93, body extent -0.7,-1.52 0.7,1.52, height 1.12
SOT486-1_V [mm] "Thin QFP, 144-Leads, Body 20x20mm, Pitch 0.5mm, NXP Recommended"
  rect 1.5x0.4 smd: 1(-10.9,8.81) 36(-10.9,-8.81) 73(10.9,-8.81) 108(10.9,8.81)
  rect 1.5x0.28 smd: 2(-10.9,8.25) 3(-10.9,7.75) 4(-10.9,7.25) 5(-10.9,6.75) 6(-10.9,6.25) 7(-10.9,5.75) 8(-10.9,5.25) 9(-10.9,4.75) 10(-10.9,4.25) 11(-10.9,3.75) 12(-10.9,3.25) 13(-10.9,2.75) 14(-10.9,2.25) 15(-10.9,1.75) 16(-10.9,1.25) 17(-10.9,0.75) 18(-10.9,0.25) 19(-10.9,-0.25) 20(-10.9,-0.75) 21(-10.9,-1.25) 22(-10.9,-1.75) 23(-10.9,-2.25) 24(-10.9,-2.75) 25(-10.9,-3.25) 26(-10.9,-3.75) 27(-10.9,-4.25) 28(-10.9,-4.75) 29(-10.9,-5.25) 30(-10.9,-5.75) 31(-10.9,-6.25) 32(-10.9,-6.75) 33(-10.9,-7.25) 34(-10.9,-7.75) 35(-10.9,-8.25) 74(10.9,-8.25) 75(10.9,-7.75) 76(10.9,-7.25) 77(10.9,-6.75) 78(10.9,-6.25) 79(10.9,-5.75) 80(10.9,-5.25) 81(10.9,-4.75) 82(10.9,-4.25) 83(10.9,-3.75) 84(10.9,-3.25) 85(10.9,-2.75) 86(10.9,-2.25) 87(10.9,-1.75) 88(10.9,-1.25) 89(10.9,-0.75) 90(10.9,-0.25) 91(10.9,0.25) 92(10.9,0.75) 93(10.9,1.25) 94(10.9,1.75) 95(10.9,2.25) 96(10.9,2.75) 97(10.9,3.25) 98(10.9,3.75) 99(10.9,4.25) 100(10.9,4.75) 101(10.9,5.25) 102(10.9,5.75) 103(10.9,6.25) 104(10.9,6.75) 105(10.9,7.25) 106(10.9,7.75) 107(10.9,8.25)
  rect 0.4x1.5 smd: 37(-8.81,-10.9) 72(8.81,-10.9) 109(8.81,10.9) 144(-8.81,10.9)
  rect 0.28x1.5 smd: 38(-8.25,-10.9) 39(-7.75,-10.9) 40(-7.25,-10.9) 41(-6.75,-10.9) 42(-6.25,-10.9) 43(-5.75,-10.9) 44(-5.25,-10.9) 45(-4.75,-10.9) 46(-4.25,-10.9) 47(-3.75,-10.9) 48(-3.25,-10.9) 49(-2.75,-10.9) 50(-2.25,-10.9) 51(-1.75,-10.9) 52(-1.25,-10.9) 53(-0.75,-10.9) 54(-0.25,-10.9) 55(0.25,-10.9) 56(0.75,-10.9) 57(1.25,-10.9) 58(1.75,-10.9) 59(2.25,-10.9) 60(2.75,-10.9) 61(3.25,-10.9) 62(3.75,-10.9) 63(4.25,-10.9) 64(4.75,-10.9) 65(5.25,-10.9) 66(5.75,-10.9) 67(6.25,-10.9) 68(6.75,-10.9) 69(7.25,-10.9) 70(7.75,-10.9) 71(8.25,-10.9) 110(8.25,10.9) 111(7.75,10.9) 112(7.25,10.9) 113(6.75,10.9) 114(6.25,10.9) 115(5.75,10.9) 116(5.25,10.9) 117(4.75,10.9) 118(4.25,10.9) 119(3.75,10.9) 120(3.25,10.9) 121(2.75,10.9) 122(2.25,10.9) 123(1.75,10.9) 124(1.25,10.9) 125(0.75,10.9) 126(0.25,10.9) 127(-0.25,10.9) 128(-0.75,10.9) 129(-1.25,10.9) 130(-1.75,10.9) 131(-2.25,10.9) 132(-2.75,10.9) 133(-3.25,10.9) 134(-3.75,10.9) 135(-4.25,10.9) 136(-4.75,10.9) 137(-5.25,10.9) 138(-5.75,10.9) 139(-6.25,10.9) 140(-6.75,10.9) 141(-7.25,10.9) 142(-7.75,10.9) 143(-8.25,10.9)
  silkscreen extent -11.02,-9.75 9.75,9.75, body extent -10,-10 10,10, height 1.6
SPM6530T [mm] "Precision Wire Wound Inductor, 2-Leads, Body 6.95x6.50mm, IPC Medium Density"
  rect 2.8x3.5 smd: 1(-2.75,0) 2(2.75,0)
  silkscreen extent -3.55,-3.4 3.55,3.4, body extent -3.55,-3.4 3.55,3.4, height 3
TL3301 [mm]
  rect 1.4x2.1 smd: 1(-2.3,4.5) 1(-2.3,-4.5) 2(2.3,4.5) 2(2.3,-4.5)
  silkscreen extent -2.2,-2.4 2.2,2.4
TPS54327 [mm] "QFN, 18-Leads, Body 3.00x3.00mm, Pitch 0.50mm, Thermal Pad 2.40x1.65mm, IPC Medium Density"
  oval 0.5x0.2 smd: 1(-1.35,1) 2(-1.35,0.5) 3(-1.35,0) 4(-1.35,-0.5) 5(-1.35,-1) 6(1.35,-1) 7(1.35,-0.5) 8(1.35,0) 9(1.35,0.5) 10(1.35,1)
  rect 1.65x2.4 smd: 11(0,0)
  Top Layer region: 0.127,-1.6 0.381,-1.6 0.381,-1.194 0.127,-1.194
  Top Layer region: -0.381,-1.6 -0.127,-1.6 -0.127,-1.194 -0.381,-1.194
  Top Layer region: -0.381,1.194 -0.127,1.194 -0.127,1.6 -0.381,1.6
  Top Layer region: 0.127,1.194 0.381,1.194 0.381,1.6 0.127,1.6
  silkscreen extent -2.48,-1.7 1.7,1.7, body extent -1.55,-1.55 1.55,1.55, height 1

## Part data
C5 C6 C11 C12 C13 C14 C15 C16 C17 C18 C19 C20 C21 C22 C23 C24 C25 C26 C27 C28 C29 C30 C31 C32 C33: "Capacitor (Semiconductor SIM Model)"
C7 C8 C9 C10 C34 C35 C36 C37 C38 C39 C40 C41 C42 C43 C44 C45 C46 C47 C48 C49 C50 C51 C52 C53 C73 C74 C77 C78 C79 C80 C82 C83 C84 C85 C86 C87 C88 C90 C91 C97 C98 C99 C102 C102 C103 C104 C105 C106 C107 C108 C109: library part "Cap Semi", "Capacitor (Semiconductor SIM Model)"
C54 C55 C56 C57 C75 C76 C89 C96 C101: library part "Cap Pol3", "Polarized Capacitor (Surface Mount)"
C71 C72: library part "Cap Pol1", "Polarized Capacitor (Radial)"
D5: library part Diode, "Default Diode"
DBGEN1 P8 P11 TRST1 VSSIO1: "Header, 2-Pin"
FB12 FB13 FB14 FB15 FB16 L1: library part Inductor, "Inductor"
J1: library part PWR2.5, "Power jack"
P1 P4: "Header, 8-Pin, Dual row"
P2: "Header, 3-Pin, Dual row"
P3: "Header, 10-Pin, Dual row"
P5: "Header, 6-Pin, Dual row"
P6 P9 P10: "Header, 3-Pin"
P7: library part "BCS Serial Port - Molex", "BCS UART Port Molex"
Q1: library part PMOS-2, "P-Channel Power MOSFET"
R9 R10 R11 R12 R13 R14 R15 R16 R17 R18 R19 R31 R34 R35: "Resistor"
R20 R21 R22 R23 R24 R25 R26 R27 R28 R29 R30 R32 R33 R36 R37 R40 R41 R44 R45 R48 R49 R52 R53 R56 R57 R60 R61 R64 R65 R68 R69 R70 R71 R72 R73 R74 R75: library part Res3, "Resistor"
STATUS1: library part "RGB LED APTF1616SEEZGQBDC", "RGB LED"
U1: "32-bit ARM Cortex-M4 MCU, 264 kB SRAM, 2 HS USB with on-chip PHY, Ethernet, CAN, AES, SPIFI, SGPIO, SCT, 144-Pin LQFP"
U2: library part TXS0104E, "TXS0104E - Bidriectional Opendrain/pushpull level shift"
U3: "MAX11300"
U5: library part TPS796
U8: library part TPS73733-Q1
USB0 USB1: library part "Micro USB", "Micro USB Jack B"
X1: library part XTAL, "Crystal Oscillator"
X2: "ABS07-32.768KHZ-T RTC Crystal Oscillator"

## Free pads (board coordinates)
  round 100 hole 100: ""(1250,2025) ""(3250,325) ""(3250,1425)

## Via types
v1: diameter 30, hole 15, Top Layer to Bottom Layer, 230 vias
v2: diameter 25, hole 15, Top Layer to Bottom Layer, 165 vias
v3: diameter 50, hole 15, Top Layer to Bottom Layer, 14 vias
v4: diameter 40, hole 20, Top Layer to Bottom Layer, 7 vias
v5: diameter 40, hole 15, Top Layer to Bottom Layer, 1 vias
v6: diameter 50, hole 20, Top Layer to Bottom Layer, 1 vias

## Nets (pads, with @x,y where several pads share a name; then routed paths per layer and width w, separated by ;. In a path a pad name is that pad's centre, name@x,y a point inside that pad or via, vN(x,y) a via of type N, cw(c..) or ccw(c..) an arc to the next point about the centre after c; other vN are vias at no path point)
5VDC: C7.2 C8.2 C103.2 C104.2 D3.2 P1.9 P7.4 P9.1 P10.1 P11.2 Q1.3 U2.14 U8.5 U8.8 | length 11351.3
  Top Layer w8: C103.2@1240,758.15 1240,727 1295.39,671.61 U8.8@1335.94,671.61
  Top Layer w15: U2.14@798.31,1248.9 C7.2@798.31,1327.44 ; C7.2@800,1327.44 v1(895,1327.44) ; v1(1665,215) 1705,175 2100,175 P1.9@2150,125
  Top Layer w20: v3(635,1075) 680,1075 715,1040 855,1040 925,1110 1005,1110 1050,1065 1585,1065 v1(1670,980)
  Top Layer w30: v6(1132.5,2065) 1174,2106.5 3185,2106.5 ; C103.2@1240,758.15 1244.96,753.18 U8.5@1335.94,753.18
  Top Layer w35: v3(1095,865) v3(1165,865) 1165,818.7 ; D3.2@1145,760 D3.2@1145,762.17 1145,795 1166.85,816.85 C104.2@1240,816.85 C103.2@1240,758.15 ; P11.2@3205,1618 3205,1814 3239,1848 3239,2052.5 3185,2106.5 4550,2106.5 4575,2081.5 v4(4575,2065)
  Top Layer w40: v3(690,1278) Q1.3@690,1364.57
  Bottom Layer w15: v1(1665,215) 1665,255 1653,267 1653,838.84 1670,855.84 v1(1670,980)
  Bottom Layer w35: P7.4@465,880 200,880 43.5,1036.5 43.5,1918.5 170,2045 470,2045 526.33,1988.67 1056.17,1988.67 v6(1132.5,2065) ; P10.1@4495,605 4495,725 4461,759 4461,880 4495,914 4495,1550 4495,1615 4575,1695 v4(4575,2065)
+6VCC: C82.2 C83.2 C84.1 C90.2 C91.2 C97.2 C98.2 L1.2 R68.1 U5.1 U5.2 U5.8 U7.12 U7.13 U7.14 | length 2671.8
  Top Layer w8: U5.8@4266.85,766.61 4266.85,748.15 4280,735 4402.56,735
  Top Layer w15: R68.1@1544,311.44 C84.1@1600.59,311.44 ; U5.1@4373.15,766.85 U5.2@4373.15,792.2
  Top Layer w20: U5.1@4373.15,766.85 4402.56,737.44
  Top Layer w30: C91.2@4474.41,737.44 C90.2@4530,737.44 4530,700 v4(4540,690)
  Top Layer w35: 4402.56,737.44 C91.2@4474.41,737.44
  Top Layer w40: v1(1612,265) C84.1@1612,321.85
  Bottom Layer w15: v3(635,470) 809,470 1015,264 v1@1612,264
  Bottom Layer w35: v4(4540,690) 4581.5,648.5 4581.5,76.5 v4(4565,60)
  Bottom Layer w40: v3(635,470) 635,568 718,651 v3(939,651)
-AVDD: C48.2 C49.2 C50.2 C54.2 C56.2 FB16.2 U3.41 VSSIO1.1 | length 824.4
  Top Layer w25: v4(4000,1135) 4070,1135 4107.56,1172.56 C50.2@4107.56,1205 C49.2@4107.56,1255 C48.2@4107.56,1305 4107.56,1387.56 VSSIO1.1@4110,1390 4110,1400 4170,1460 4315,1460 4334.53,1440.47 C56.2@4334.53,1310 ; C56.2@4334.53,1305 4358.31,1281.22 FB16.2@4358.31,1230
  other v2: 3735.04,1005.04 3778.35,1005.04 3821.65,1005.04 3864.96,1005.04 3735.04,1048.35 3778.35,1048.35 3821.65,1048.35 3864.96,1048.35 3735.04,1091.65 3778.35,1091.65 3821.65,1091.65 3864.96,1091.65 3735.04,1134.96 3778.35,1134.96 3821.65,1134.96 3864.96,1134.96
ADC0_5: P5.2 U1.144 | length 1347
  Top Layer w8: U1.144@2704.13,1306.85 2726.85,1306.85 2760,1340 v2(2775,1340)
  Bottom Layer w8: P5.2@2650,225 2552,323 2552,1117 2642,1207 2666.6,1207 2713,1253.4 2713,1278 v2(2775,1340)
ADC0_7: P5.4 U1.136 | length 1147.5
  Top Layer w8: v2(2580,1100) 2627.01,1147.01 U1.136@2704.13,1147.01
  Bottom Layer w8: v2(2580,1100) 2580,1075 2566,1061 2566,329 2630,265 2710,265 P5.4@2750,225
AN0: P5.1 U1.138 | length 1341.3
  Top Layer w8: v2@2490,1165 2533,1165 2550,1148 2583,1148 2608.5,1173.5 2643.3,1173.5 2656.18,1186.38 U1.138@2704.13,1186.38
  Bottom Layer w8: v2(2495,1165) 2509,1151 2509,266 P5.1@2650,125
AN1: P5.3 U1.139 | length 1409.2
  Top Layer w8: v2(2522.5,1187.5) 2530,1195 2555,1195 2567.5,1182.5 2594.32,1182.5 2599.32,1187.5 2637.5,1187.5 2656.06,1206.06 U1.139@2704.13,1206.06
  Bottom Layer w8: v2(2522.5,1187.5) 2522.5,1157.5 2530,1150 2530,1135 2523,1128 2523,271.8 2629.8,165 2710,165 P5.3@2750,125
AN2: P5.5 U1.2 | length 1667.3
  Top Layer w8: U1.2@2599.8,1389.13 2599.8,1424.8 2612.5,1437.5 v2(2612.5,1452.5)
  Bottom Layer w8: v2(2612.5,1452.5) 2597.5,1452.5 2580,1435 2580,1340 2590,1330 2590,1246.82 2550,1206.82 2550,1135 2538,1123 2538,276.6 2634.6,180 2795,180 P5.5@2850,125
AN3: P5.7 U1.142 | length 1362.4
  Top Layer w8: U1.142@2704.13,1265.12 2749.88,1265.12 v2(2795,1220)
  Bottom Layer w8: v2(2795,1220) 2815,1200 2815,930 2755,870 2755,570 2805,520 2805,195 2830,170 2905,170 P5.7@2950,125
AN4: P5.9 U1.6 | length 2398.4
  Top Layer w8: U1.6@2521.06,1389.13 2525,1393.07 2525,1445 2535,1455 2535,1565.36 2554.64,1585 2751,1585 2901,1735 v2(2920,1735)
  Bottom Layer w8: v2(2920,1735) 2920,1055 2875,1010 2875,871.82 2880.06,866.76 2880.06,710.06 2850,680 2850,405 2905,350 2905,210 2945,170 3005,170 P5.9@3050,125
AN5: P6.1 U1.143 | length 1469.7
  Top Layer w8: U1.143@2704.13,1284.8 2765.2,1284.8 v2(2795,1255) ; v2(2770,345) 2840,345 2905,410 3085,410 P6.1@3125,450
  Bottom Layer w8: v2(2770,345) 2740,375 2740,875 2800,935 2800,1170 2772.5,1197.5 2772.5,1232.5 v2(2795,1255)
AN5_GPIO2_4: P6.3 U1.9 | length 1529.4
  Top Layer w8: U1.9@2462.01,1389.13 2462.01,1357.99 2470,1350 v2(2470,1325) ; v2(2485,410) 2485,390 2535,340 2733.18,340 2760.68,367.5 2842.5,367.5 P6.3@2925,450
  Bottom Layer w8: v2(2470,1325) 2490,1305 2490,1225 2472.5,1207.5 2472.5,1152.5 2485,1140 v2(2485,410)
AVDD: C88.2 C89.1 C102.2@4376.85,1045 C107.2 C108.2 C109.2 FB7.2 FB8.2 FB9.2 FB15.2 P11.1 U6.2 U6.5 | length 948.2
  Top Layer w10: v1(3427.56,742.44) C107.2@3475,742.44 3521.06,742.44 FB7.2@3525,746.38 ; v1(3907.44,647.56) C109.2@3907.44,695 3911.38,698.94 FB8.2@3911.38,745 ; FB9.2@3918.62,1470 3922.56,1473.94 C108.2@3922.56,1520 v1(3922.56,1567.44) ; U6.2@4477.4,1150 U6.5@4477.4,1244.49
  Top Layer w30: v4(4144,1150.85) 4185.15,1150.85 4213,1123 C89.1@4213,1055 ; C88.2@4223.15,930 FB15.2@4276.69,930 4276.69,973.31 4241.93,1008.07 C89.1@4241.93,1055 ; v4(4325,1045) C102.2@4376.85,1045 4390,1045 4445,1100 4460,1100 4477.4,1117.4 U6.2@4477.4,1150
CNVT: R26.1 U1.46 | length 2114.7
  Top Layer w8: U1.46@1847.54,1129 U1.46@1845.87,1127.32 1977.29,1127.32 1993.61,1111 2405.8,1111 2504.8,1210 2585,1210 v2(2585,1205) ; v2(2750,1370) 2750,1400 2755,1405 2755,1435 2800,1480 2999.8,1480 3214.8,1265 3335,1265 3415,1185 3415,1100 3465,1050 R26.1@3490.47,1050
  Bottom Layer w8: v2(2585,1205) 2585,1210 2625.2,1210 2636.2,1221 2660.8,1221 2699,1259.2 2699,1294 2750,1345 v2(2750,1370)
CNVT_M: R26.2 U3.8 | length 144.5
  Top Layer w8: R26.2@3549.53,1050 3550.32,1049.21 3630.79,1049.21 3659.21,1020.79 U3.8@3681.89,1020.79
CS_M: R24.2 U3.5 | length 199.8
  Top Layer w8: R24.2@3549.53,1200 3570,1200 3590,1180 3590,1149.8 3659.96,1079.84 U3.5@3681.89,1079.84
DBGEN: R16.1 U1.28 | length 970.4
  Top Layer w8: R16.1@1329.53,1640 1369.53,1600 1800,1600 1840,1640 v2(1865,1640) ; v2(2010,1530) 2050,1490 2080,1490 2095,1475 2095,1450 2087.99,1442.99 U1.28@2087.99,1389.13
  Bottom Layer w8: v2(1865,1640) 1915,1640 1935,1620 1935,1595 2000,1530 v2(2010,1530)
DIGI_2: P4.12 U1.91 | length 2526
  Top Layer w8: v2(1995,1820) 2035,1860 2368.18,1860 2380.68,1872.5 2472.5,1872.5 2500,1900 2500,1945 2540,1985 2910,1985 P4.12@2950,2025 ; U1.91@2284.84,530.87 2284.84,599.84 v2(2300,615)
  Bottom Layer w8: v2(1995,1820) 1995,1775 2015,1755 2015,1566.82 2035,1546.82 2035,1519.64 2049.64,1505 2075,1505 2105,1475 2105,795.55 2200.55,700 2240,700 2300,640 v2(2300,615)
DIN: R30.2 U3.3 | length 260.3
  Top Layer w8: R30.2@3549.53,1300 3570,1300 3618,1252 3618,1161.4 3660.18,1119.21 U3.3@3681.89,1119.21
DOUT: R27.2 U3.6 | length 169.6
  Top Layer w8: R27.2@3549.53,1150 3570,1150 3659.84,1060.16 U3.6@3681.89,1060.16
DVDD: C9.2 C10.2 C11.2 C12.2 C16.1 C21.2 C22.2 C23.2 C24.2 C25.2 C26.2 C27.2 C28.2 C29.2 C30.2 C31.2 C32.2 C33.2 C101.1 C102.2@1468.15,850 DBGEN1.1 FB1.1 FB2.1 FB5.1 JTAG/DEBUG1.1@1385,1440 P1.3 P1.7 P2.2 R12.2 R18.2 R19.2 R20.1 R21.2 TRST1.1 U1.5 U1.25 U1.36 U1.41 U1.59 U1.71 U1.77 U1.94 U1.107 U1.111 U1.127 U1.131 U1.141 U2.1 U2.8 U8.1 | length 4026.3
  Top Layer w10: v1(625.47,1805.47) R12.2@625.47,1850 ; TRST1.1@875,1725 877.44,1722.56 C11.2@960,1722.56 v1(1007.56,1722.56) ; v1(1245,1440) JTAG/DEBUG1.1@1385,1440 ; DBGEN1.1@1300,1725 1302.44,1722.56 C12.2@1385,1722.56 v1(1430,1722.56) ; U8.1@1454.06,671.61 1454.06,654.94 1468,641 ; v2@1520,1240.47 R18.2@1520,1280 ; R19.2@1520,1444.53 v2(1559.53,1444.53) ; v1(1680,1285) 1680,1245 1699.25,1225.75 U1.41@1845.87,1225.75 ; v1(1695,635.2) U1.71@1845.87,635.2 ; v1(1712.56,917.44) 1712.56,870 1732.56,890 1790,890 1808.58,871.42 U1.59@1845.87,871.42 ; v1(1782.56,1447.56) C31.2@1782.56,1405 1792.56,1395 1922.28,1395 U1.36@1928.15,1389.13 ; v1(1970,434.56) C23.2@2012,434.56 ; C23.2@2009.25,437.31 U1.77@2009.25,530.87 ; v1@2060.79,1530 2112.44,1530 2112.44,1467.56 2147.05,1432.95 U1.25@2147.05,1389.13 ; v1(2300,422.56) C24.2@2345,422.56 ; C24.2@2343.9,431.1 U1.94@2343.9,530.87 ; U1.5@2540.75,1389.13 2540.75,1439.53 2567.44,1466.23 C30.2@2567.44,1515 v1(2567.44,1557.56) ; C26.2@2599.8,465.64 U1.107@2599.8,530.87 ; C26.2@2610.44,455 2610.44,424.56 2625,410 v1(2665,410) ; C26.2@2615,455 C26.2@2615,465 ; U1.111@2704.13,654.88 2882.32,654.88 2882.32,682.32 2900,700 v1(2920,700) ; U1.127@2704.13,969.84 2762.28,969.84 C33.2@2772.44,980 v1(2772.44,1022.44) ; U1.131@2704.13,1048.58 2831.14,1048.58 C28.2@2835,1052.44 2842.44,1045 2865,1045 v1(2885,1065) ; U1.141@2704.13,1245.43 2735.04,1245.43 2750,1230.48 2750,1210 2765,1195 2830,1195 2850,1215 C29.2@2850,1252.44 v1(2895,1252.44) ; R20.1@3620,1435 v1(3620,1480)
  Top Layer w15: v2@798.31,1071.32 U2.8@798.31,1111.1 ; U2.1@837.68,1248.9 837.68,1257.68 857.44,1277.44 C9.2@980,1277.44 v1(1075,1277.44) ; FB5.1@2985,1156.38 v2(3020,1156.38)
  Top Layer w20: v1(2220,1825) FB1.1@2220,1773.62 FB2.1@2270,1773.62
  Top Layer w30: 1468,641 1531,641 1565,675 1565,825.72 1540.72,850 C102.2@1468.15,850 1468.15,966.22 C101.1@1471.93,970 v3(1550,970)
  other v1: 2060,1530
  other v2: 798.63,1071 1520,1240
GND: C5.1 C6.1 C7.1 C8.1 C9.1 C10.1 C11.1 C12.1 C13.1 C14.1 C15.1 C16.2 C19.1 C20.1 C21.1 C22.1 C23.1 C24.1 C25.1 C26.1 C27.1 C28.1 C29.1 C30.1 C31.1 C32.1 C33.1 C34.1 C35.1 C36.1 C37.1 C38.1 C39.1 C40.1 C41.1 C42.1 C43.1 C44.1 C45.1 C46.1 C47.1 C48.1 C49.1 C50.1 C51.1 C52.1 C53.1 C54.1 C55.1 C56.1 C71.2 C72.2 C73.1 C74.1 C75.2 C76.2 C77.1 C78.1 C79.1 C82.1 C83.1 C85.1 C86.1 C87.1 C88.1 C89.2 C90.1 C91.1 C96.2 C97.1 C98.1 C99.1 C101.2 C102.1 C103.1 C104.1 C105.1 C106.1 C107.1 C108.1 C109.1 FB3.2 FB4.2 FB6.1 FB10.1 FB11.1 FB12.1 FB13.2 FB14.1 FB17.1 FB18.1 FB19.1 FB21.1 JTAG/DEBUG1.3 JTAG/DEBUG1.5 JTAG/DEBUG1.9 P1.11 P1.13 P2.6 P3.8 P7.3 P7.5 R9.1 R15.1 R17.1 R22.1 R35.1 R69.1 R74.1 R75.1 RESET1.2 STATUS1.1 U1.4 U1.40 U1.76 U1.109 U2.7 U2.15 U3.1 U4.5 U4.11 U5.6 U5.9 U6.4 U7.7 U7.17 U8.4 U8.9 U9.2 U9.8 U9.9 USB0.5 USB1.5 VSSIO1.2 | length 6829.8
  Top Layer w10: FB17.1@280,1688.62 v1(320,1688.62) ; v2(305,1455) 305,1435 311.85,1428.15 U9.8@336.61,1428.15 ; v1(1575,1240) C25.1@1622.44,1240 ; C21.1@1652.44,870 1652.44,835.56 1662,826 v1(1684,826) ; v1(1679.88,1405) C31.1@1727.44,1405 ; v1(1745,525) C22.1@1745,582.44 ; v1(1750,1265) 1765,1265 1784.57,1245.43 U1.40@1845.87,1245.43 ; U1.76@1989.57,530.87 1989.57,594.57 v1(2005,610) ; v1(2012,334.44) C23.1@2012,379.44 ; v2(2082.44,1777.56) C5.1@2170,1777.56 ; C24.1@2345,367.44 v1(2390,367.44) ; FB4.2@2350,1558.62 v2(2350,1595) ; v2(2382.44,1602.44) C14.1@2382.44,1640 ; FB3.2@2415,1558.62 v2(2415,1595) ; U1.4@2560.43,1389.13 2560.43,1435.43 2601,1476 2611,1476 2622.56,1487.56 C30.1@2622.56,1515 v1(2665,1515) ; C15.1@2607.56,1640 v2(2645,1640) ; v1(2630,660) 2650,640 2650,625 2661.85,613.15 U1.109@2704.13,613.15 ; C33.1@2827.56,980 2862.44,980 C20.1@2900,1017.56 2902.56,1017.56 2930,1045 v2(2950,1045) ; C28.1@2835,1107.56 v1(2885,1107.56) ; C29.1@2850,1307.56 v1(2895,1307.56) ; v2(2857.56,857.44) C19.1@2900,857.44 ; C27.1@2937.56,655 v1(2980,655) ; v1(3332.56,847.44) C35.1@3375,847.44 C34.1@3425,847.44 C36.1@3475,847.44 C37.1@3525,847.44 C39.1@3575,847.44 C38.1@3625,847.44 v1(3667.44,847.44) ; v1(3432.44,797.56) C107.1@3475,797.56 ; C41.1@3575,742.44 C40.1@3625,742.44 3627.56,745 v1(3670,745) ; v1(3622.44,1290) C45.1@3622.44,1385 ; U3.1@3681.89,1158.58 v1(3681.89,1233.11) ; v1(3730,755) FB10.1@3730,796.38 ; v1(3860,845) C42.1@3915,845 ; C108.1@3867.44,1520 v1(3867.44,1567.44) ; FB11.1@3880,1303.62 v1(3923.62,1303.62) ; C43.1@3907.44,795 C42.1@3907.44,845 ; C46.1@3922.56,1370 v1(3965,1370) ; C47.1@3922.56,1420 v1(3965,1420) ; v1(3962.56,652.56) C109.1@3962.56,695 ; C52.1@4205,812.44 C52.1@4210.35,817.8 ; v1@4554.49,1244.49 v1(4555,1245)
  Top Layer w15: v1(104,1312) 143.38,1312 FB19.1@166.38,1335 ; USB0.5@223.46,1592.17 v1(285.83,1592.17) ; USB1.5@223.46,2002.17 v1(285.83,2002.17) ; v1(258,1305) 275,1322 C105.1@275,1357.44 ; C106.1@340,1807.44 v1(382.56,1807.44) ; R75.1@554.53,1325 v2(554.53,1363.47) ; R74.1@554.53,1430 554.53,1425.47 v2(585,1395) ; v1(580.55,2090.55) RESET1.2@652.83,2090.55 v1(652.83,2027.17) ; v2(627,759) 648.16,780.16 U7.7@680.94,780.16 ; v1(637,974) 637,961 645.47,952.53 R35.1@645.47,930 ; C51.1@656.85,650 v1(656.85,703.85) ; v1(700,1640) R15.1@740.47,1640 ; v2(775,889) 830.85,889 C99.1@870,928.15 ; C13.1@782.56,1850 v1(782.56,1890) ; C7.1@800,1382.56 v1(895,1382.56) ; U2.7@837.68,1111.1 837.68,1071.32 v2(838,1071) ; 870,707.44 C97.1@935,707.44 ; C11.1@960,1667.44 v1(1010,1667.44) ; C9.1@980,1332.56 v1@1082.56,1332.56 ; v1(1007.17,2032.83) RESET1.2@1007.17,2090.55 v1(1079.45,2090.55) ; C96.2@1121.93,970 1121.93,963.07 v1(1160,925) ; v1(1125,1640) R17.1@1170.47,1640 ; C103.1@1240,651.85 1246.85,645 v1(1300,645) ; C16.2@1297.56,1390 JTAG/DEBUG1.3@1385,1390 ; v1(1385,1625) C12.1@1385,1667.44 ; U8.4@1454.06,748.39 1468.39,748.39 1480,760 v1(1480,790) 1493.04,803.04 1523.51,803.04 R22.1@1525,804.53 ; C85.1@1495,468.56 v1(1495,509.06) ; R69.1@1544,470.5 v1(1544,511) ; v1(2175,1480) C32.1@2175,1520 ; C6.1@2320,1777.56 2320,1805 v1(2345,1830) ; C26.1@2665.56,455 v1(2712,455) ; v2(2983.62,1065) FB6.1@2983.62,1100 ; v1(4200,1369.53) C54.1@4200,1405 ; C52.1@4210.35,817.8 U5.6@4266.85,817.8 ; v1(4220,1325) 4255.47,1325 C56.1@4275.47,1305 ; C55.1@4334.53,1155 4354.53,1175 v1(4382,1175)
  Top Layer w20: v1(112,1745) FB21.1@166.38,1745 ; FB18.1@280,2098.62 v1(334.38,2098.62) ; v1(362.2,1240.87) U9.2@362.2,1321.85 ; STATUS1.1@3285,890.87 v1(3285,938.31)
  Top Layer w25: v1(818.44,707.44) 870,707.44 C98.1@870,651.85 ; C50.1@4052.44,1205 C49.1@4052.44,1255 C48.1@4052.44,1305 4052.44,1432.44 VSSIO1.2@4110,1490 ; v1(4465,50) 4500,50 4515,65 C71.2@4515,123.07 4558.15,166.22 C73.1@4558.15,360 ; v1(4467.56,2060) C72.2@4515,2060 ; U6.4@4514.8,1244.49 v1@4554.49,1244.49 ; C72.2@4515,2026.93 4558.15,1983.78 C74.1@4558.15,1790
  Top Layer w30: v1(780,48.15) C76.2@780,95 ; v1(1215,43.15) C75.2@1215,90 ; C89.2@4080,1050 v1(4080,1096.85) ; v1(4111.85,875) C88.1@4111.85,935 ; v1(4157.44,812.44) C52.1@4205,812.44 ; C91.1@4460,848.15 4498.15,848.15 v1(4520,870) ; C102.1@4483.15,1060 4515,1060 v1(4535,1040) ; C87.1@4528.15,935 v1(4575,935) ; C90.1@4530,792.56 v1(4577.44,792.56)
  Top Layer w35: v1(3275,213.31) FB12.1@3335,213.31 ; v1(3280,1936.69) FB13.2@3340,1936.69
  Top Layer w50: v3(635,160) v3(693.31,160) FB14.1@693.31,70
  other v1: 1395,50 1465,50 1535,50 1605,50 1370,130 1405,130 1440,130 1475,130 1510,130 1605,145 1440,165 1475,165 1510,165 3385,170 3500,175 3605,175 3700,175 3800,175 3900,175 4000,175 4100,175 4200,175 4300,175 1510,200 4475,200 1605,215 3385,265 915,295 1130,305 1010,320 3385,335 595,350 1605,375 1010,390 3385,405 1010,460 3385,475 1605,500 1200,520 1235,520 1270,520 1305,520 1340,520 3385,545 710,555 745,555 780,555 815,555 850,555 885,555 920,555 955,555 990,555 1025,555 1060,555 1095,555 1130,555 1165,555 1200,555 1235,555 1270,555 1305,555 1340,555 1605,570 920,590 955,590 990,590 1025,590 1060,590 1095,590 1130,590 1165,590 1450,605 3385,615 1605,640 3385,685 4320,695 4375,695 1605,710 1605,780 3350,780 1305,810 1605,850 1305,880 1605,920 3335,925 3390,975 3455,985 1605,990 605,1005 675,1005 745,1005 1215,1005 1250,1005 3540,1010 1305,1015 1075,1332.56 4575,1350 3550,1415 4575,1420 3550,1490 4575,1490 4575,1560 3550,1565 3505,1600 4575,1630 3385,1760 3385,1830 3385,1900 3500,1975 3600,1975 3700,1975 3800,1975 3900,1975 4000,1975 4100,1975 4200,1975 4300,1975 3385,2065
  other v2: 1360,385.85 1360,429.15 1395,688.35 1395,731.65 722,772 758,772 4305,775 4335,775 4305,805 4335,805 722,808 758,808 4305,835 4335,835 796.35,1158.35 839.65,1158.35 796.35,1201.65 839.65,1201.65 353.35,1375 396.65,1375
GPIO1_0: P3.3 U1.50 | length 1102.6
  Top Layer w8: P3.3@1490,1925 1490,1855 1535,1810 v2(1625,1810) ; v2(1745,1105) 1801.42,1048.58 U1.50@1845.87,1048.58
  Bottom Layer w8: v2(1625,1810) 1650,1785 1650,1560.81 1725,1485.81 1725,1155 1745,1135 v2(1745,1105)
GPIO1_1: P3.5 U1.51 | length 1037.1
  Top Layer w8: v2(1705,1125) 1720,1110 1720,1095 1786.1,1028.9 U1.51@1845.87,1028.9
  Bottom Layer w8: P3.5@1590,1925 1590,1800 1635,1755 1635,1240 1705,1170 v2(1705,1125)
GPIO1_3: P3.7 U1.53 | length 1086.1
  Top Layer w8: v2(1775,985) 1795,985 1799.53,989.53 U1.53@1845.87,989.53
  Bottom Layer w8: P3.7@1690,1925 1690,1880 1666,1856 1666,1564.61 1739,1491.61 1739,1311 1760,1290 1760.36,1290 1775.36,1275 1775.36,1225.15 1753.5,1203.3 1753.5,1146.3 1775,1124.8 v2(1775,985)
GPIO1_5: P3.9 U1.56 | length 1228.4
  Top Layer w8: v2(1710,1730) 1725,1745 1775,1745 v2(1790,1760) ; v2(1780,920) 1790.47,930.47 U1.56@1845.87,930.47
  Bottom Layer w8: v2(1710,1730) 1695.5,1715.5 1695.5,1574.71 1807.56,1462.65 1807.56,1237.56 1767.5,1197.5 1767.5,1152.1 1800,1119.6 1800,970 1780,950 v2(1780,920)
  Bottom Layer w10: v2(1790,1760) P3.9@1790,1925
GPIO1_9: P3.1 U1.49 | length 1095.1
  Top Layer w8: v2(1675,1155) 1706.82,1155 1726.82,1135 1750,1135 1806.34,1078.66 1806.34,1078.3 1816.37,1068.27 U1.49@1845.87,1068.27
  Bottom Layer w8: P3.1@1390,1925 1515,1800 1515,1725 1620,1620 1620,1565 1621,1564 1621,1234.2 1675,1180.2 v2(1675,1155)
GPIO1_10: P5.12 U1.102 | length 917.8
  Top Layer w8: U1.102@2501.38,530.87 2501.38,491.38 2455,445 2455,399.6 2532.1,322.5 3052.5,322.5 P5.12@3150,225